# EAGLE board dual power supply (EAGLE 9.6.2)
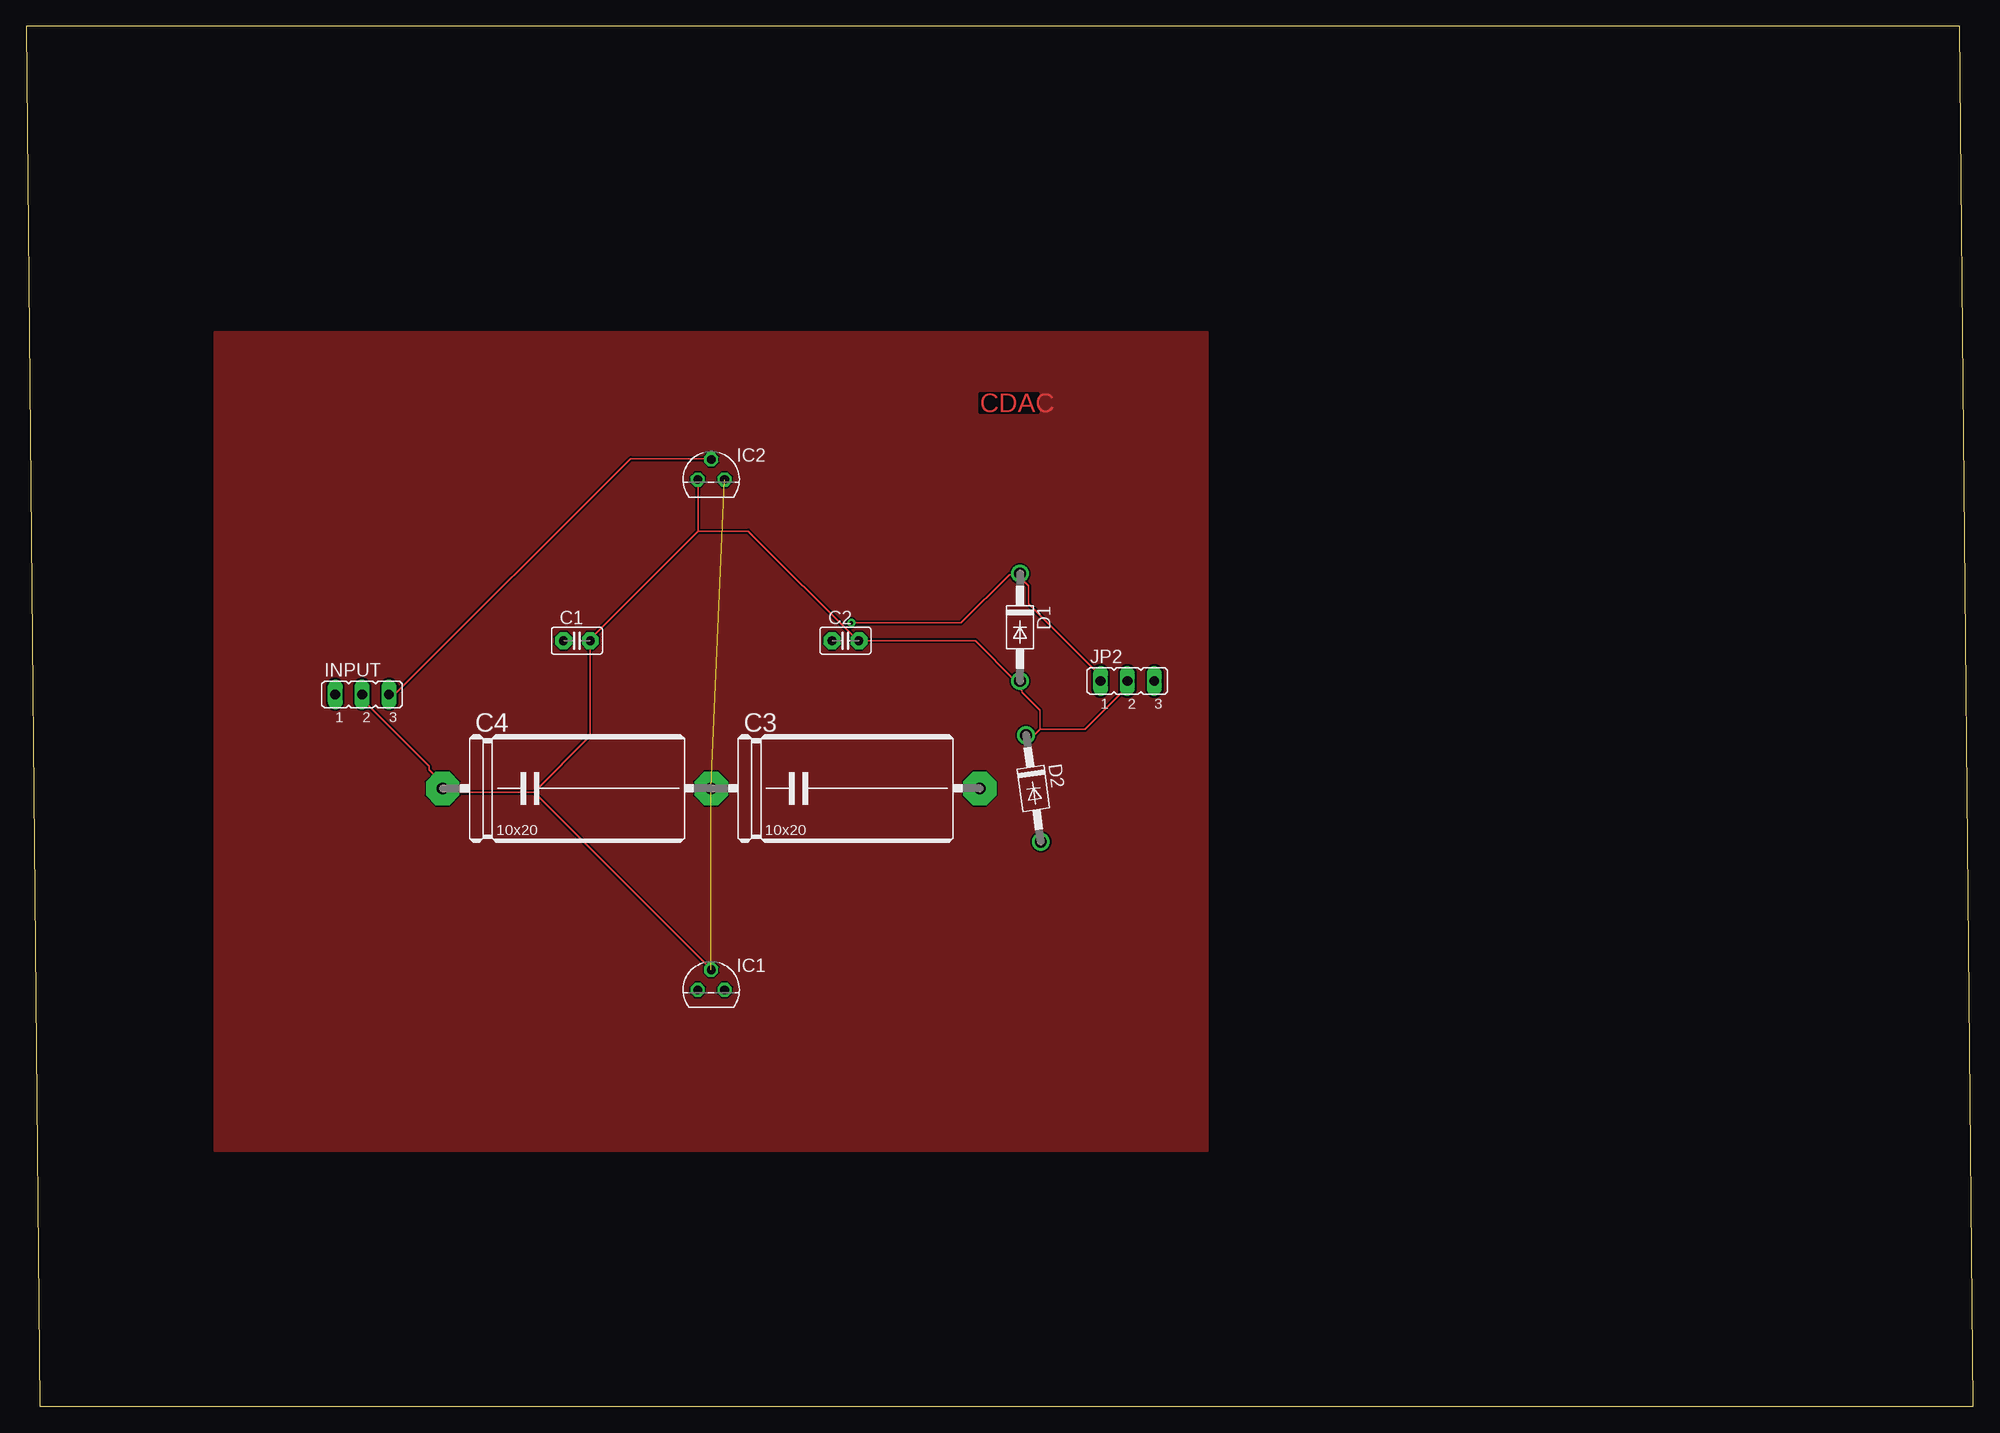
[diagram p0: board, top side]
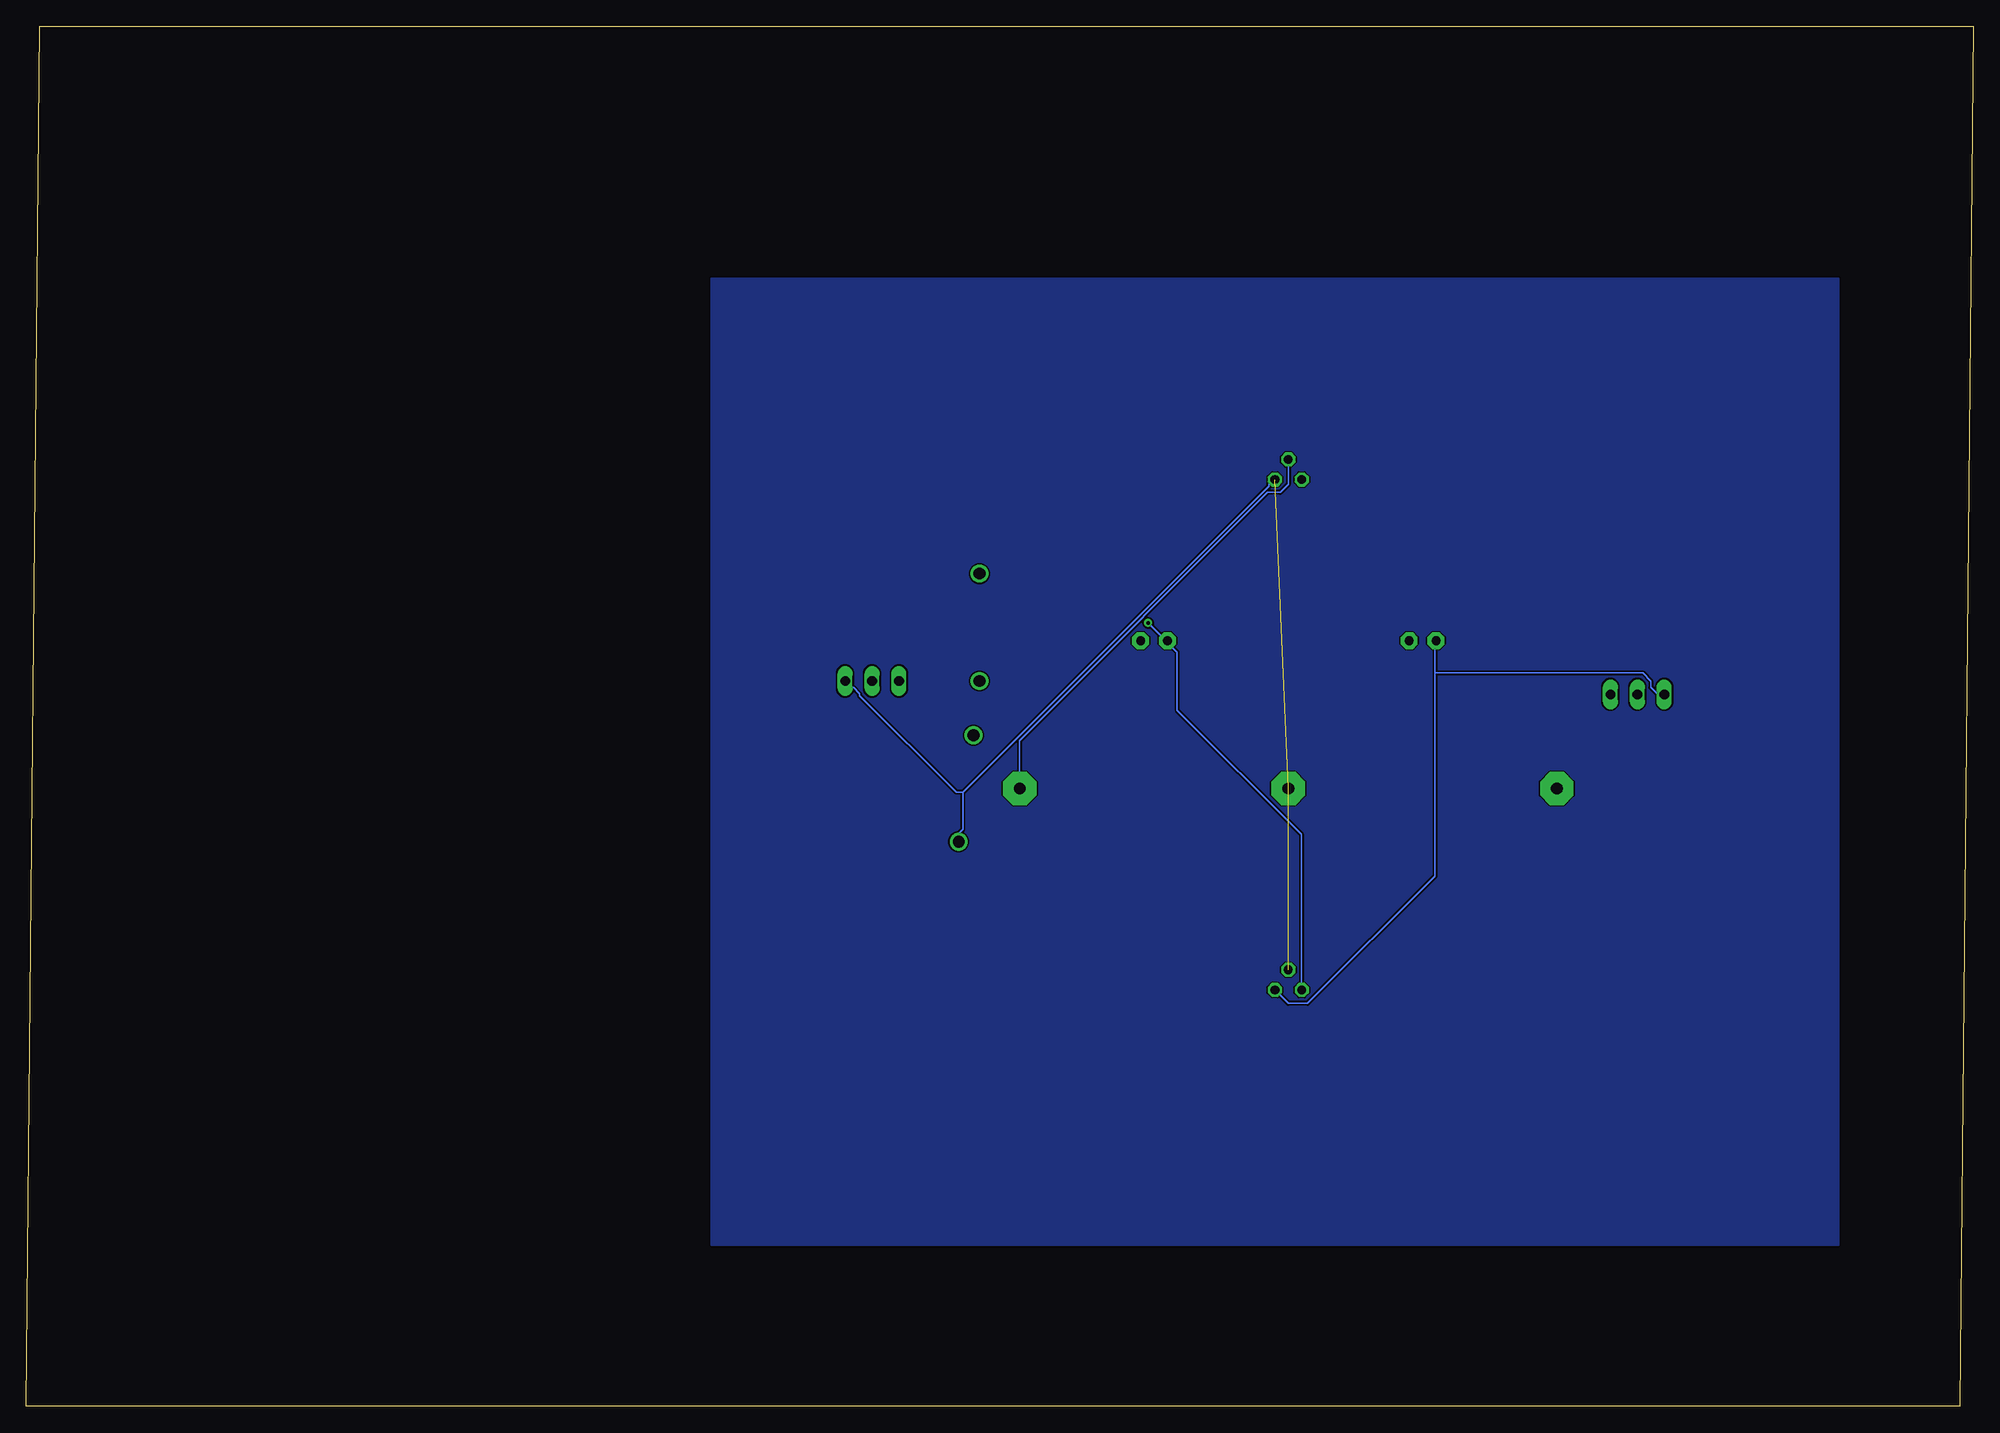
[diagram p1: board, bottom side, seen from below]

Size 184.13 x 130.48 mm. Coordinates in mm from the lower left corner, seen from the top.
Outline: 1.27,0 184.13,0 182.86,130.48 0,130.48 1.27,0
Copper layers (1*16): Top 0.035mm / dielectric 1.5mm / Bottom 0.035mm
Design rules "default": minimum track width 6mil, minimum drill 0.35mm, track to track 6mil, track to pad 6mil, pad to pad 6mil, via to via 6mil, smd to smd 6mil, copper to edge 40mil, drill to drill 6mil, minimum pad ring 10mil, minimum via ring 8mil, stop-mask expansion 4mil, vias tented up to drill 0mil, thermal gap 10mil

## Footprints (pad centres in the part's own frame; a part is rotated, then mirrored left to right if it is on the bottom)
C2.5-2 = drill 0.813 pad 1.6 octagon: 1 -1.27,0; 2 1.27,0
EU25-10 = drill 1.118 pad 3.15 octagon: 1 -12.7,0; 2 12.7,0
DO41-10 = drill 1.118: A 5.08,0; C -5.08,0
TO92 = drill 0.813 octagon: 1 -1.27,0; 2 0,1.905; 3 1.27,0
JP2 = drill 0.914 long: 1 -2.54,0; 2 0,0; 3 2.54,0

## Placement (x,y rotation side)
C1  0.33UF  [C2.5-2]  52.07,72.39 0 top
C2  0.1UF  [C2.5-2]  77.47,72.39 0 top
C3  2.2UF  [EU25-10]  77.47,58.42 0 top
C4  1UF  [EU25-10]  52.07,58.42 0 top
D1  1N4004  [DO41-10]  93.98,73.66 270 top
D2  1N4004  [DO41-10]  95.25,58.42 277.9 top
IC1  7815L  [TO92]  64.77,39.37 0 top
IC2  [TO92]  64.77,87.63 0 top
INPUT  [JP2]  31.75,67.31 0 top
JP2  [JP2]  104.14,68.58 0 top

## Library data of the parts
C1 C2 = capacitor-wima
C3 C4 = rcl; SPICEPREFIX: C
D1 D2 = diode
IC1 IC2 = linear
INPUT JP2 = jumper

## Nets
IC7815: C1.2 C2.2 C3.1 C4.1 D1.A D2.C IC1.2 IC2.1 INPUT.2 JP2.2
N$1: C2.1 D1.C IC1.1 JP2.1
N$2: C3.2 IC2.2 INPUT.3
N$3: C1.1 IC1.3 INPUT.1
N$4: C4.2 D2.A IC2.3 JP2.3

## Tracks (layer width: path | path; a pad name or v marks a point on that pad's centre or on a via)
BOTTOM
  pour Bottom: 13.97,106.68 114.3,106.68 119.38,106.68 119.38,15.24 12.7,15.24 12.7,106.68
IC7815  (1 unrouted)
  Top 0.152: 95.86,64.01 100.13,64.01 104.09,67.97 104.09,68.58 JP2.2 | 95.86,64.01 95.4,63.55 94.64,63.55 D2.C | 95.86,64.01 95.86,65.84 94.18,67.51 94.18,67.67 94.03,67.82 94.03,68.58 D1.A 93.57,68.58 89.76,72.39 C2.2 78.64,72.39 68.28,82.75 63.55,82.75 | 63.55,82.75 63.55,87.63 IC2.1 | 63.55,82.75 53.34,72.54 C1.2 53.34,63.4 48.01,58.06 | 48.01,58.06 64.77,41.3 IC1.2 | 48.01,58.06 39.78,58.06 39.47,58.37 C4.1 39.32,58.52 39.32,58.98 38.1,60.2 38.1,60.5 31.85,66.75 31.85,67.21 INPUT.2
N$1  (via drill 0.35)
  Top 0.152: JP2.1 101.5,68.58 101.5,69.19 94.79,75.89 94.79,77.57 94.03,78.33 94.03,78.64 D1.C 93.88,78.64 92.96,78.64 88.39,74.07 v78.03,74.07
  Bottom 0.152: 76.2,72.24 75.29,71.32 75.29,65.84 63.55,54.1 63.55,39.47 IC1.1 | 76.2,72.24 v78.03,74.07 | 76.2,72.24 C2.1
N$2
  Top 0.152: IC2.2 64.77,89.61 57.15,89.61 34.9,67.36 34.29,67.36 INPUT.3
  Bottom 0.152: IC2.2 64.77,87.17 65.53,86.41 66.75,86.41 90.22,62.94 90.22,58.52 C3.2
N$3
  Bottom 0.152: IC1.3 64.77,38.1 62.94,38.1 50.9,50.14 50.9,69.34 | 50.9,69.34 50.9,72.39 C1.1 | 50.9,69.34 31.24,69.34 30.48,68.58 30.48,67.97 29.87,67.36 29.26,67.36 INPUT.1
N$4  (1 unrouted)
  Bottom 0.152: 95.55,58.06 66.6,87.02 66.6,87.17 66.14,87.63 IC2.3 | 95.55,58.06 95.55,54.56 95.86,54.25 95.86,53.49 D2.A | JP2.3 106.07,67.97 105.92,67.97 105.31,67.36 105.31,67.21 96.16,58.06 95.55,58.06
TOP
  pour Top: 19.05,101.6 111.76,101.6 111.76,24.13 22.86,24.13 20.32,24.13 17.78,24.13 17.78,101.6

## Text on the board
Top: CDAC